# Altium PCB 辉光管时钟2号.pcbdoc (part 2 of 2)
Units mil, origin at the board's own origin, x right, y up, seen from the top; angles counter-clockwise.
Board outline 9093.95 x 3420 mil, 2 copper layers (Top Layer, Bottom Layer); 109 components, 221 nets, 539 pads, 88 vias.
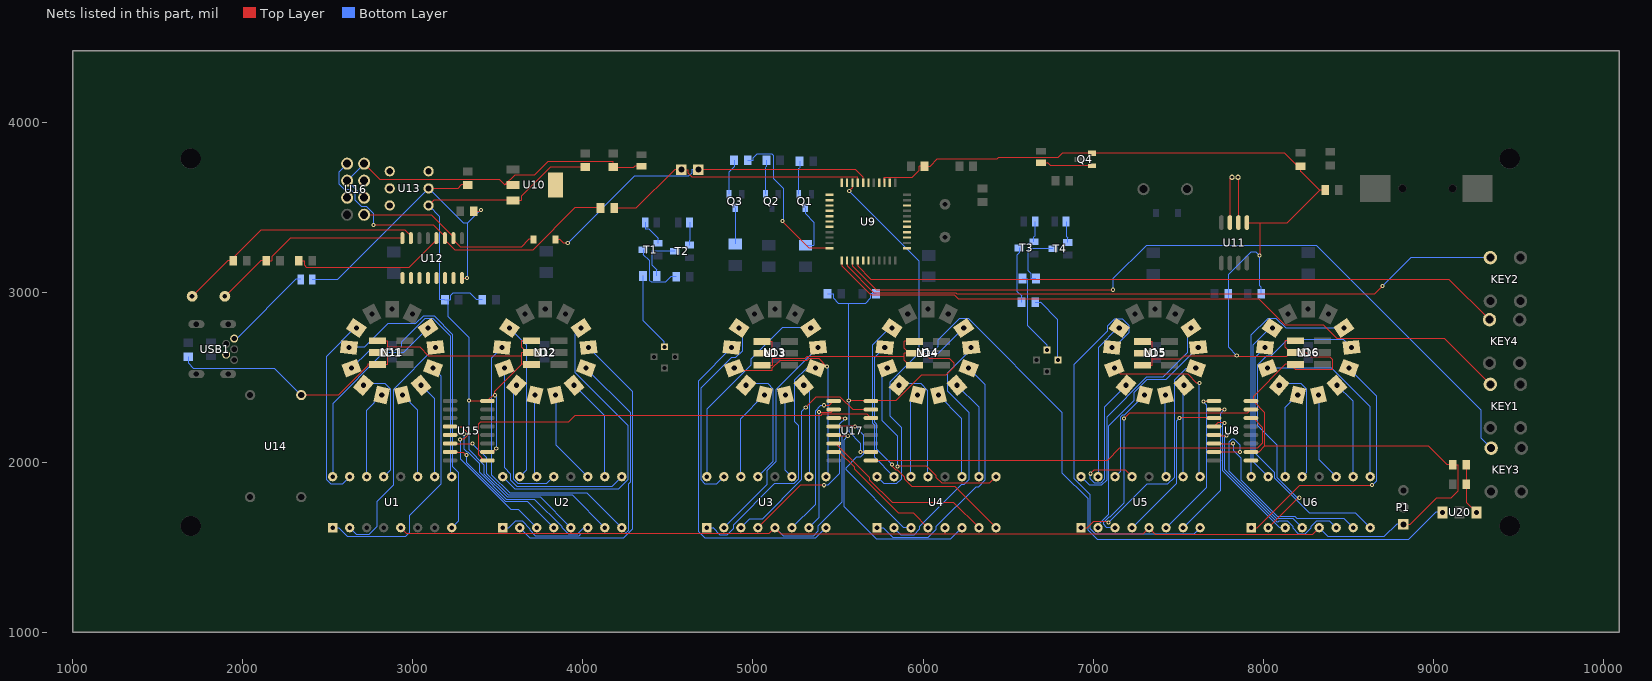
[diagram p2: the nets of this part, all layers, seen from the top]

## Via types
v1: diameter 24, hole 12, Top Layer to Bottom Layer, 88 vias

## Nets (pads, with @x,y where several pads share a name; then routed paths per layer and width w, separated by ;. In a path a pad name is that pad's centre, name@x,y a point inside that pad or via, vN(x,y) a via of type N, cw(c..) or ccw(c..) an arc to the next point about the centre after c; other vN are vias at no path point) (continued)
P2.3: R6.1 U9.33 | length 936.9
  Top Layer w6: v1(5172.45,3417.2) 5331.55,3258 U9.33@5450.95,3258
  Bottom Layer w6: R6.1@4968.95,3775 5000.85,3775 5000.85,3788.9 5025.75,3813.8 5110.75,3813.8 5118.95,3805.6 5118.95,3670.1 5177.55,3611.6 5177.55,3422.2 v1(5172.45,3417.2)
P2.4: KEY1.3 U9.34 | length 4134.6
  Top Layer w6: U9.34@5521.95,3187 5521.95,3154.3 5691.55,2984.7 6183.95,2984.7 6208.25,2960.5 7975.05,2960.5 8126.45,2809 8352.75,2809 8432.15,2729.6 9063.75,2729.6 KEY1.3@9335.35,2457.9
P2.5: KEY2.3 U9.35 | length 3970.6
  Top Layer w6: U9.35@5552.95,3187 5552.95,3154.3 5710.35,2996.8 6192.25,2996.8 6198.35,2990.8 8656.45,2990.8 v1(8700.65,3035)
  Bottom Layer w6: v1(8700.65,3035) 8868.65,3202.9 KEY2.3@9335.35,3202.9
P2.6: KEY3.3 U9.36 | length 4580.7
  Top Layer w6: U9.36@5584.95,3187 5584.95,3154.3 5725.25,3014 v1(7115.55,3014)
  Bottom Layer w6: v1(7115.55,3014) 7115.55,3077.6 7311.75,3273.8 8313.95,3273.8 9281.85,2305.9 9281.85,2141.4 KEY3.3@9340.35,2082.9
P2.7: KEY4.3 U9.37 | length 3878.2
  Top Layer w6: U9.37@5615.95,3187 5615.95,3154.3 5696.55,3073.7 9094.65,3073.7 KEY4.3@9330.35,2837.9
P2.A: U2.3 U15.4 | length 922.7
  Top Layer w6: U15.4@3219.95,2210 3286.75,2210 3323.95,2172.9 3323.95,2158.4 3300.35,2134.8 v1(3277.75,2134.8)
  Bottom Layer w6: v1(3277.75,2134.8) 3277.75,2021.4 3574.85,1724.4 3619.55,1724.4 U2.3@3728.95,1615
P2.B: U2.6 U15.5 | length 1157.5
  Top Layer w6: U15.5@3219.95,2160 3225.45,2165.5 v1(3301.05,2165.5)
  Bottom Layer w6: v1(3301.05,2165.5) 3301.05,2078.8 3317.25,2062.7 3324.45,2062.7 3391.95,1995.2 3389.55,1992.8 3389.55,1944 3550.15,1783.4 3714.55,1783.4 3875.15,1622.8 3875.15,1616.6 3913.45,1578.3 3968.65,1578.3 4005.35,1615 U2.6@4028.95,1615
P2.C: U2.7 U15.6 | length 1168
  Top Layer w6: U15.6@3219.95,2110 v1(3350.05,2110)
  Bottom Layer w6: v1(3350.05,2110) 3431.45,2028.5 3431.45,1936.4 3560.15,1807.7 3936.25,1807.7 U2.7@4128.95,1615
P2.D: U2.4 U15.7 | length 817.3
  Top Layer w6: U15.7@3219.95,2060 3297.25,2060 v1(3315.65,2041.6)
  Bottom Layer w6: v1(3315.65,2041.6) 3315.65,2000.7 3545.05,1771.3 3672.65,1771.3 U2.4@3828.95,1615
P3.2: U9.20 U20.1 | length 5263.2
  Top Layer w6: v1(5566.15,3594.3) 5582.15,3610.3 5584.95,3610.3 U9.20@5584.95,3643
  Bottom Layer w6: v1(5566.15,3594.3) 5978.85,3181.6 5978.85,2663.3 5989.05,2653 6062.15,2653 6087.05,2678 6087.05,2717.6 6213.35,2843.8 6267.45,2843.8 6819.75,2291.5 6819.75,1935.1 6970.05,1784.8 6970.05,1601.1 7027.25,1543.9 8853.75,1543.9 9014.85,1705 U20.1@9053.95,1705
P3.4: U9.22
P3.A: U3.3 U17.15 | length 1349
  Top Layer w6: v1(5310.45,2322.7) 5373.15,2385.4 5510.75,2385.4 5586.05,2310 U17.15@5692.95,2310
  Bottom Layer w6: U3.3@4928.95,1615 4981.85,1667.9 5056.15,1667.9 5287.55,1899.3 5287.55,2299.8 v1(5310.45,2322.7)
P3.B: U3.6 U17.1 | length 876.5
  Top Layer w6: v1(5418.35,2335) 5449.95,2335 U17.1@5474.95,2360
  Bottom Layer w6: U3.6@5228.95,1615 5368.15,1754.2 5368.15,2303.7 5399.45,2335 v1(5418.35,2335)
P3.C: U3.7 U17.2 | length 796.7
  Top Layer w6: v1(5389.35,2294.7) 5459.65,2294.7 U17.2@5474.95,2310
  Bottom Layer w6: U3.7@5328.95,1615 5389.35,1675.3 v1(5389.35,2294.7)
P3.D: U3.4 U17.3 | length 1017.1
  Top Layer w6: U3.4@5028.95,1615 5278.75,1864.8 v1(5417.35,1864.8) ; U17.3@5474.95,2260 5538.45,2260 v1(5542.35,2256.2)
  Bottom Layer w6: v1(5417.35,1864.8) 5439.75,1864.8 5508.45,1933.5 5508.45,2222.3 v1(5542.35,2256.2)
P4.A: U4.3 U17.4 | length 982.5
  Top Layer w6: U17.4@5474.95,2210 5475.25,2210.3 v1(5600.55,2210.3)
  Bottom Layer w6: v1(5600.55,2210.3) 5652.45,2158.4 5652.45,2049.9 5633.55,2031 5610.15,2031 5547.45,1968.3 5547.45,1954.3 5886.75,1615 U4.3@5928.95,1615
P4.B: U4.6 U17.5 | length 1312.9
  Top Layer w6: U17.5@5474.95,2160 5480.05,2154.9 v1(5557.35,2154.9)
  Bottom Layer w6: v1(5557.35,2154.9) 5535.25,2132.9 5535.25,1737.1 5726.35,1546 6159.95,1546 U4.6@6228.95,1615
P4.C: U4.7 U17.6 | length 1067.1
  Top Layer w6: U17.6@5474.95,2110 5486.55,2110 5687.95,1908.6 5687.95,1894.9 5820.75,1762.1 6181.85,1762.1 U4.7@6328.95,1615
P4.D: U4.4 U17.7 | length 744.5
  Top Layer w6: U17.7@5474.95,2060 5507.45,2060 5594.45,1973 5594.45,1962.4 5855.25,1701.6 5942.35,1701.6 U4.4@6028.95,1615
P5.A: U5.3 U8.15 | length 1520.3
  Top Layer w6: v1(7182.55,2257.9) 7211.85,2287.3 7905.25,2287.3 U8.15@7927.95,2310
  Bottom Layer w6: U5.3@7128.95,1615 7080.75,1615 7061.45,1634.3 7061.45,1647.5 7094.65,1680.7 7101.45,1680.7 7182.55,1761.7 v1(7182.55,2257.9)
P5.B: U5.6 U8.1 | length 912.4
  Top Layer w6: v1(7647.75,2356.2) 7706.15,2356.2 U8.1@7709.95,2360
  Bottom Layer w6: U5.6@7428.95,1615 7667.95,1853.9 7667.95,2336.1 v1(7647.75,2356.2)
P5.C: U5.7 U8.2 | length 857.7
  Top Layer w6: U8.2@7709.95,2310 v1(7771.95,2310)
  Bottom Layer w6: U5.7@7528.95,1615 7749.85,1835.9 7749.85,2287.9 v1(7771.95,2310)
P5.D: U5.4 U8.3 | length 963
  Top Layer w6: v1(7507.25,2260) U8.3@7709.95,2260
  Bottom Layer w6: U5.4@7228.95,1615 7490.75,1876.8 7490.75,2243.5 v1(7507.25,2260)
P6.A: U6.3 U8.4 | length 860.8
  Top Layer w6: U8.4@7709.95,2210 7731.25,2231.3 v1(7771.55,2231.3)
  Bottom Layer w6: v1(7771.55,2231.3) 7761.95,2221.7 7761.95,1951.1 8098.15,1615 U6.3@8128.95,1615
P6.B: U6.6 U8.5 | length 1153.8
  Top Layer w6: U8.5@7709.95,2160 7713.55,2156.4 v1(7783.15,2156.4)
  Bottom Layer w6: v1(7783.15,2156.4) 7774.15,2147.4 7774.15,1956.2 8083.65,1646.7 8086.15,1646.7 8091.85,1652.4 8143.55,1652.4 8175.15,1620.7 8175.15,1610.4 8209.35,1576.3 8242.65,1576.3 8278.95,1612.6 8278.95,1621.4 8310.25,1652.6 8391.35,1652.6 U6.6@8428.95,1615
P6.C: U6.7 U8.6 | length 1122.9
  Top Layer w6: U8.6@7709.95,2110 v1(7823.35,2110)
  Bottom Layer w6: v1(7823.35,2110) 7823.35,2070.9 7866.65,2027.7 7866.65,1898 8081.05,1683.6 8186.05,1683.6 8198.25,1671.5 8472.45,1671.5 U6.7@8528.95,1615
P6.D: U6.4 U8.7 | length 1017.8
  Top Layer w6: U8.7@7709.95,2060 7710.25,2059.7 v1(7864.45,2059.7)
  Bottom Layer w6: v1(7864.45,2059.7) 7864.45,2098.8 7829.45,2133.8 7815.85,2133.8 7798.35,2116.3 7798.35,1949.1 8075.95,1671.5 8172.45,1671.5 U6.4@8228.95,1615
PP1.1: N11.3 U1.15 | length 1133.7
  Bottom Layer w6: U1.15@2628.95,1915 2588.25,1874.3 2517.05,1874.3 2490.35,1901 2490.35,2620 2659.85,2789.5 N11.3@2668.35,2789.47
PP1.2: N11.4 U1.8 | length 1898.9
  Bottom Layer w6: N11.4@2624.95,2674.9 2715.05,2674.9 2853.55,2813.5 3015.85,2813.5 3061.25,2859 3128.15,2859 3236.35,2750.7 3236.35,1972.5 3269.65,1939.1 3269.65,1655.7 U1.8@3228.95,1615
PP1.3: N11.5 U1.9 | length 1591.4
  Bottom Layer w6: N11.5@2639.65,2553.3 2742.85,2656.6 2910.45,2656.6 2933.05,2679.2 2933.05,2706.5 3070.85,2844.3 3120.15,2844.3 3224.25,2740.2 3224.25,1919.7 U1.9@3228.95,1915
PP1.4: N11.6 U1.13 | length 708.3
  Bottom Layer w6: N11.6@2709.25,2452.5 2717.15,2460.5 2838.55,2460.5 2870.15,2428.9 2870.15,1956.2 U1.13@2828.95,1915
PP1.5: N11.7 U1.14 | length 517.4
  Bottom Layer w6: U1.14@2728.95,1915 2728.95,2306.9 N11.7@2817.75,2395.6
PP1.6: N11.8 U1.11 | length 517.4
  Bottom Layer w6: N11.8@2940.18,2395.62 3028.95,2306.8 U1.11@3028.95,1915
PP1.7: N11.9 U1.10 | length 570.8
  Bottom Layer w6: N11.9@3048.64,2452.54 3128.95,2372.2 U1.10@3128.95,1915
PP1.8: N11.10 U1.1 | length 1544.6
  Bottom Layer w6: U1.1@2528.95,1615 2565.55,1615 2615.25,1565.3 2959.05,1565.3 2982.95,1589.2 2982.95,1689.2 3166.45,1872.6 3166.45,2505.1 N11.10@3118.22,2553.34
PP1.9: N11.11 U1.2 | length 1389.5
  Bottom Layer w6: U1.2@2628.95,1615 2666.35,1577.6 2744.95,1577.6 2791.15,1623.7 2791.15,1769.3 2888.15,1866.3 2888.15,2430.1 N11.11@3132.99,2674.94
PP1.10: N11.12 U1.16 | length 1174.3
  Bottom Layer w6: U1.16@2528.95,1915 2528.95,2344.2 2827.65,2642.9 2943.05,2642.9 N11.12@3089.55,2789.47
PP2.1: N12.3 U2.15 | length 931
  Bottom Layer w6: N12.3@3568.35,2789.47 3666.85,2690.9 3666.85,1952.9 U2.15@3628.95,1915
PP2.2: N12.4 U2.8 | length 1670.5
  Bottom Layer w6: N12.4@3524.95,2674.9 3461.85,2611.9 3461.85,1926.8 3568.95,1819.8 4024.15,1819.8 U2.8@4228.95,1615
PP2.3: N12.5 U2.9 | length 1366.3
  Bottom Layer w6: N12.5@3539.65,2553.3 3539.65,1966.2 3577.15,1928.7 3577.15,1894.1 3614.55,1856.6 4170.55,1856.6 U2.9@4228.95,1915
PP2.4: N12.6 U2.13 | length 825.7
  Bottom Layer w6: N12.6@3609.25,2452.5 3592.25,2435.5 3592.25,1900 3620.25,1872 3785.95,1872 U2.13@3828.95,1915
PP2.5: N12.7 U2.14 | length 485.2
  Bottom Layer w6: N12.7@3717.75,2395.6 3717.75,1926.2 U2.14@3728.95,1915
PP2.6: N12.8 U2.11 | length 558.8
  Bottom Layer w6: N12.8@3840.18,2395.62 3840.15,2103.8 U2.11@4028.95,1915
PP2.7: N12.9 U2.10 | length 612.2
  Bottom Layer w6: N12.9@3948.64,2452.54 4128.95,2272.2 U2.10@4128.95,1915
PP2.8: N12.10 U2.1 | length 1872.5
  Bottom Layer w6: U2.1@3528.95,1615 3565.55,1615 3602.35,1651.8 3645.15,1651.8 3690.25,1606.7 3690.25,1598.9 3723.05,1566.2 3976.55,1566.2 3988.65,1578.3 4245.45,1578.3 4265.55,1598.4 4265.55,1870.1 4277.65,1882.3 4277.65,2293.9 N12.10@4018.22,2553.34
PP2.9: N12.11 U2.2 | length 1883.3
  Bottom Layer w6: U2.2@3628.95,1615 3689.95,1554 4238.35,1554 4289.85,1605.5 4289.85,2418.1 N12.11@4032.99,2674.94
PP2.10: N12.12 U2.16 | length 1821
  Bottom Layer w6: U2.16@3528.95,1915 3599.45,1844.5 4210.25,1844.5 4265.55,1899.8 4265.55,2214.9 3955.45,2525 3955.45,2755.3 N12.12@3989.55,2789.47
PP3.1: N13.3 U3.15 | length 1176.9
  Bottom Layer w6: U3.15@4828.95,1915 4787.85,1873.9 4717.95,1873.9 4692.35,1899.5 4692.35,2434 4871.65,2613.3 4896.45,2613.3 4935.85,2652.7 4935.85,2772 N13.3@4918.35,2789.47
PP3.2: N13.4 U3.8 | length 1955.3
  Bottom Layer w6: N13.4@4874.95,2674.9 4680.25,2480.2 4680.25,1591.2 4719.35,1552.1 5366.05,1552.1 U3.8@5428.95,1615
PP3.3: N13.5 U3.9 | length 1259.9
  Top Layer w6: N13.5@4889.65,2553.3 4901.85,2541.2 5113.05,2541.2 5114.75,2543 5114.75,2554.6 5159.25,2599.1 5319.55,2599.1 5331.65,2611.2 5386.15,2611.2 v1(5435.25,2562)
  Bottom Layer w6: U3.9@5428.95,1915 5439.45,1925.5 5439.45,2557.8 v1(5435.25,2562)
PP3.4: N13.6 U3.13 | length 729
  Bottom Layer w6: N13.6@4959.25,2452.5 4967.15,2460.5 5088.55,2460.5 5120.15,2428.9 5120.15,2006.2 U3.13@5028.95,1915
PP3.5: N13.7 U3.14 | length 538.1
  Bottom Layer w6: U3.14@4928.95,1915 4928.95,2256.9 N13.7@5067.75,2395.6
PP3.6: N13.8 U3.11 | length 496.7
  Bottom Layer w6: N13.8@5190.18,2395.62 5190.15,1953.8 U3.11@5228.95,1915
PP3.7: N13.9 U3.10 | length 552.2
  Bottom Layer w6: N13.9@5298.64,2452.54 5331.55,2419.6 5331.55,1917.6 U3.10@5328.95,1915
PP3.8: N13.10 U3.1 | length 1450.1
  Bottom Layer w6: U3.1@4728.95,1615 4765.55,1615 4808.95,1571.6 4845.05,1571.6 4882.75,1609.2 4882.75,1630.4 5124.95,1872.6 5239.65,1872.6 5267.05,1900 5267.05,2217.6 5243.65,2240.9 5243.65,2481.7 5315.35,2553.3 N13.10@5368.22,2553.34
PP3.9: N13.11 U3.2 | length 1289.4
  Bottom Layer w6: U3.2@4828.95,1615 5083.25,1869.3 5083.25,1951.6 5138.15,2006.5 5138.15,2430.1 N13.11@5382.99,2674.94
PP3.10: N13.12 U3.16 | length 1226.1
  Bottom Layer w6: U3.16@4728.95,1915 4728.95,2311 4987.95,2570.1 4987.95,2606.4 5171.05,2789.5 N13.12@5339.55,2789.47
PP4.1: N14.3 U4.15 | length 982.8
  Bottom Layer w6: N14.3@5818.35,2789.47 5803.75,2789.5 5704.15,2689.9 5704.15,2229.5 5716.05,2217.6 5716.05,2151.5 5715.15,2150.6 5715.15,2028.8 U4.15@5828.95,1915
PP4.2: N14.4 U4.8 | length 1533
  Top Layer w6: v1(5818.25,1985.7) 5818.25,1977.4 5841.85,1953.8 5850.15,1953.8 5892.35,1911.6 5892.35,1899.2 5935.45,1856.1 6187.85,1856.1 U4.8@6428.95,1615
  Bottom Layer w6: N14.4@5774.95,2674.9 5716.25,2616.3 5716.25,2234.6 5728.35,2222.4 5728.35,2146.7 5727.25,2145.5 5727.25,2076.7 v1(5818.25,1985.7)
PP4.3: N14.5 U4.9 | length 1269.1
  Top Layer w6: v1(5850.55,1974.9) 6023.15,1974.9 6078.95,1919 6078.95,1908.2 6111.45,1875.7 6389.65,1875.7 U4.9@6428.95,1915
  Bottom Layer w6: N14.5@5789.65,2553.3 5761.45,2525.2 5761.45,2242.5 5850.55,2153.4 v1(5850.55,1974.9)
PP4.4: N14.6 U4.13 | length 694.9
  Bottom Layer w6: N14.6@5859.25,2452.5 5867.15,2460.5 5988.55,2460.5 6028.95,2420.1 U4.13@6028.95,1915
PP4.5: N14.7 U4.14 | length 496.7
  Bottom Layer w6: U4.14@5928.95,1915 5928.95,2356.9 N14.7@5967.75,2395.6
PP4.6: N14.8 U4.11 | length 538.1
  Bottom Layer w6: N14.8@6090.18,2395.62 6228.95,2256.8 U4.11@6228.95,1915
PP4.7: N14.9 U4.10 | length 591.5
  Bottom Layer w6: N14.9@6198.64,2452.54 6328.95,2322.2 U4.10@6328.95,1915
PP4.8: N14.10 U4.1 | length 1508.2
  Bottom Layer w6: U4.1@5728.95,1615 5765.55,1615 5822.35,1558.2 6031.65,1558.2 6078.95,1605.5 6078.95,1622.8 6313.25,1857.1 6326.75,1857.1 6365.95,1896.3 6365.95,2455.6 N14.10@6268.22,2553.34
PP4.9: N14.11 U4.2 | length 1491
  Bottom Layer w6: U4.2@5828.95,1615 5872.35,1571.6 5945.05,1571.6 5978.95,1605.5 5978.95,1621.8 6223.75,1866.6 6237.95,1866.6 6268.75,1897.3 6268.75,2292.8 6141.65,2419.9 6141.65,2524 6282.95,2665.3 N14.11@6282.99,2674.94
PP4.10: N14.12 U4.16 | length 1337.5
  Bottom Layer w6: U4.16@5728.95,1915 5771.25,1872.7 5843.65,1872.7 5871.65,1900.7 5871.65,2205.9 5803.65,2273.9 5803.65,2469.9 5971.15,2637.4 6087.55,2637.4 N14.12@6239.55,2789.47
PP5.1: N15.3 U5.15 | length 931.2
  Bottom Layer w6: U5.15@7028.95,1915 7028.95,2673.8 7144.55,2789.5 N15.3@7153.35,2789.47
PP5.2: N15.4 U5.8 | length 2329
  Bottom Layer w6: N15.4@7109.95,2674.9 7124.45,2674.9 7209.95,2760.4 7209.95,2806.4 7172.15,2844.2 7125.65,2844.2 7084.85,2803.4 7084.85,2772.6 6889.55,2577.4 6889.55,1901.4 6983.25,1807.7 6983.25,1608.4 7015.55,1576.1 7590.05,1576.1 U5.8@7628.95,1615
PP5.3: N15.5 U5.9 | length 1088.9
  Top Layer w6: N15.5@7124.65,2553.3 7160.95,2517.1 7557.95,2517.1 7609.45,2465.6 v1(7624.95,2465.6)
  Bottom Layer w6: v1(7624.95,2465.6) 7624.95,1919 U5.9@7628.95,1915
PP5.4: N15.6 U5.13 | length 1007.2
  Top Layer w6: v1(6983.35,1932.4) 7002.55,1951.6 7192.35,1951.6 U5.13@7228.95,1915
  Bottom Layer w6: v1(6983.35,1932.4) 6983.35,1904 7010.85,1876.4 7043.35,1876.4 7066.15,1899.3 7066.15,2324.5 N15.6@7194.25,2452.5
PP5.5: N15.7 U5.14 | length 559.8
  Bottom Layer w6: U5.14@7128.95,1915 7161.45,1947.4 7161.45,2266.6 7173.75,2279 7186.05,2279 N15.7@7302.75,2395.6
PP5.6: N15.8 U5.11 | length 482.2
  Bottom Layer w6: N15.8@7425.18,2395.62 7425.15,1918.8 U5.11@7428.95,1915
PP5.7: N15.9 U5.10 | length 539.4
  Bottom Layer w6: U5.10@7528.95,1915 7528.95,2447.8 N15.9@7533.64,2452.54
PP5.8: N15.10 U5.1 | length 1403.3
  Top Layer w6: U5.1@6928.95,1615 6965.55,1615 7002.15,1651.6 7082.75,1651.6 v1(7089.75,1644.6)
  Bottom Layer w6: v1(7089.75,1644.6) 7318.75,1873.6 7439.35,1873.6 7478.65,1912.9 7478.65,2484.1 7547.95,2553.3 N15.10@7603.22,2553.34
PP5.9: N15.11 U5.2 | length 1369.4
  Bottom Layer w6: U5.2@7028.95,1615 7028.95,1632.2 7091.05,1694.3 7091.15,1694.3 7091.15,2213.5 7241.35,2363.7 7241.35,2410 7318.15,2486.7 7429.85,2486.7 N15.11@7617.99,2674.94
PP5.10: N15.12 U5.16 | length 1340.6
  Bottom Layer w6: U5.16@6928.95,1915 6979.65,1864.3 7048.35,1864.3 7078.95,1894.9 7078.95,2264.8 7313.05,2498.9 7410.35,2498.9 7554.05,2642.6 7554.05,2769 N15.12@7574.55,2789.47
PP6.1: N16.3 U6.15 | length 965.3
  Bottom Layer w6: U6.15@8028.95,1915 7941.05,2002.9 7941.05,2690.7 8039.85,2789.5 N16.3@8053.35,2789.47
PP6.2: N16.4 U6.8 | length 1521.9
  Bottom Layer w6: N16.4@8009.95,2674.9 7953.25,2618.2 7953.25,2051.8 8066.85,1938.2 8066.85,1906.3 8274.35,1698.8 8545.15,1698.8 U6.8@8628.95,1615
PP6.3: N16.5 U6.9 | length 1110
  Bottom Layer w6: N16.5@8024.65,2553.3 8402.55,2553.3 8628.95,2327 U6.9@8628.95,1915
PP6.4: N16.6 U6.13 | length 702.1
  Bottom Layer w6: N16.6@8094.25,2452.5 8102.15,2460.5 8223.55,2460.5 8255.15,2428.9 8255.15,1941.2 U6.13@8228.95,1915
PP6.5: N16.7 U6.14 | length 511.2
  Bottom Layer w6: U6.14@8128.95,1915 8128.95,2321.9 N16.7@8202.75,2395.6
PP6.6: N16.8 U6.11 | length 523.6
  Bottom Layer w6: N16.8@8325.18,2395.62 8325.15,2018.8 U6.11@8428.95,1915
PP6.7: N16.9 U6.10 | length 577
  Bottom Layer w6: N16.9@8433.64,2452.54 8528.95,2357.2 U6.10@8528.95,1915
PP6.8: N16.10 U6.1 | length 1582.8
  Top Layer w6: U6.1@7928.95,1615 7965.55,1615 8215.45,1864.9 v1(8640.55,1864.9)
  Bottom Layer w6: N16.10@8503.22,2553.34 8667.65,2388.9 8667.65,1892 v1(8640.55,1864.9)
PP6.9: N16.11 U6.2 | length 1777.8
  Top Layer w6: U6.2@8028.95,1615 8205.15,1791.2 v1(8211.95,1791.2)
  Bottom Layer w6: v1(8211.95,1791.2) 8199.05,1791.2 8078.95,1911.3 8078.95,2102.3 7965.35,2215.9 7965.35,2570.3 8017.45,2622.4 8042.75,2622.4 8139.95,2719.6 8473.35,2719.6 N16.11@8517.99,2674.94
PP6.10: N16.12 U6.16 | length 1444.3
  Bottom Layer w6: U6.16@7928.95,1915 7928.95,2748.4 8028.35,2847.8 8073.85,2847.8 8132.15,2789.5 N16.12@8474.55,2789.47
Q1_1: Q1.1 R4.2 | length 197
  Bottom Layer w6: Q1.1@5268.95,3575 5268.95,3727.3 5273.95,3732.4 R4.2@5273.95,3770
Q1_3: Q1.3 R13.1 | length 291
  Bottom Layer w6: Q1.3@5306.35,3496.26 5306.35,3462.5 5357.45,3411.5 5357.45,3275 R13.1@5308.95,3275
Q2_1: Q2.1 R5.2 | length 202
  Bottom Layer w6: Q2.1@5074.15,3575 5074.15,3732.5 5078.95,3737.4 R5.2@5078.95,3775
Q3_1: Q3.1 R6.2 | length 212.3
  Bottom Layer w6: Q3.1@4859.15,3575 4859.15,3707.5 4888.95,3737.4 R6.2@4888.95,3775
Q3_3: Q3.3 R15.1 | length 213.6
  Bottom Layer w6: R15.1@4895.96,3282.99 4895.95,3462 4896.55,3462.5 Q3.3@4896.55,3496.26
R8_2: R8.2 T1.C | length 371.2
  Bottom Layer w6: T1.C@4355.95,3250 4355.95,3221.2 4393.15,3184 4393.15,3068 4403.75,3057.3 4484.35,3057.3 4517.05,3090 R8.2@4548.95,3090
R9_1: Q4.1 R9.1 | length 307.2
  Top Layer w6: R9.1@6693.95,3761.53 6732.55,3761.5 6751.55,3742.6 Q4.1@6993.35,3742.6
R25_2: R25.2 T2.B | length 133.2
  Bottom Layer w6: T2.B@4626.95,3277 4626.95,3305.8 4627.45,3306.3 R25.2@4627.42,3410
R26_1: N2.K R26.1 | length 468.1
  Bottom Layer w6: R26.1@4353.95,3095 4353.95,2833 4478.95,2708 N2.K@4478.95,2678.74
R27_2: R27.2 T3.B | length 120.9
  Bottom Layer w6: T3.B@6651.95,3297 6651.95,3325.8 6658.95,3332.8 R27.2@6658.96,3415
R28_1: N3.K R28.1 | length 414.1
  Bottom Layer w6: R28.1@6658.95,2940 6690.85,2940 6792.65,2838.2 N3.K@6792.65,2600
R29_2: R29.2 T4.B | length 126.8
  Bottom Layer w6: R29.2@6840.85,3415 6840.85,3329.9 6849.95,3320.8 T4.B@6849.95,3292
R30_1: N4.K R30.1 | length 500.1
  Bottom Layer w6: R30.1@6583.95,3080 6615.85,3080 6615.85,2801 6728.95,2688 N4.K@6728.95,2658.74
RXD: R7.2 U12.3 U16.4 | length 2013.5
  Top Layer w6: v1(2768.85,3394.1) 3122.25,3394.1 3188.95,3327.4 U12.3@3188.95,3317 3188.95,3309 3250.25,3247.7 3704.65,3247.7 3951.95,3495 R7.2@4103.95,3495
  Bottom Layer w6: U16.4@2613.95,3755 2565.05,3706.1 2565.05,3636 2596.05,3605 2631.75,3605 2658.45,3578.3 2658.45,3543.5 2697.05,3505 2727.75,3505 2768.85,3463.9 v1(2768.85,3394.1)
S$18: 
S$20: 
S$21: 
S$23: 
T1_B: R19.2 T1.B | length 165.3
  Bottom Layer w6: R19.2@4367.03,3410 4367.05,3371.4 4386.35,3371.4 4441.95,3315.8 T1.B@4441.95,3287
T2_C: R26.2 T2.C | length 294.1
  Bottom Layer w6: R26.2@4433.95,3095 4433.95,3132.6 4405.25,3161.3 4405.25,3240 4407.05,3241.8 4502.45,3241.8 4504.35,3240 T2.C@4540.95,3240
T3_C: R28.2 T3.C | length 336.9
  Bottom Layer w6: T3.C@6565.95,3260 6565.95,3231.2 6552.05,3217.3 6552.05,3004.6 6578.95,2977.6 R28.2@6578.95,2940
T4_C: R30.2 T4.C | length 359.5
  Bottom Layer w6: R30.2@6663.95,3080 6632.05,3080 6632.05,3111.9 6614.15,3129.8 6614.15,3247.1 6622.05,3255 T4.C@6763.95,3255
TXD: D1.2 U12.2 U16.8 | length 1101.9
  Top Layer w6: U16.8@2713.95,3455 3109.85,3455 3238.95,3325.9 U12.2@3238.95,3317 3238.95,3308 3279.45,3267.4 3640.35,3267.4 3682.95,3310 D1.2@3709.95,3310
U8_9: U8.9
U9_1: U9.1
U9_3: U9.3
U9_4: U9.4
U9_5: U9.5
U9_6: U9.6
U9_9: U9.9
U9_13: U9.13
U9_15: U9.15
U9_17: U9.17
U9_18: D1.1 P4.1 U9.18 | length 2060.5
  Top Layer w6: D1.1@3837.95,3310 3864.95,3310 3886.45,3288.5 v1(3911.05,3288.5) ; P4.1@4678.95,3720 5603.65,3720 5647.95,3675.7 U9.18@5647.95,3643
  Bottom Layer w6: v1(3911.05,3288.5) 4302.35,3679.9 4618.85,3679.9 4638.85,3699.9 4638.85,3720 P4.1@4678.95,3720
U9_19: P5.1 R7.1 U9.19 | length 1588
  Top Layer w6: R7.1@4183.95,3495 4313.85,3495 4538.85,3720 P5.1@4578.95,3720 4619.05,3720 4619.05,3699.9 4643.25,3675.7 5615.95,3675.7 U9.19@5615.95,3643
U9_21: U9.21
U9_23: U9.23
U9_24: U9.24
U9_25: U9.25
U9_26: U9.26
U9_27: U9.27
U9_28: U9.28
U9_29: U9.29
U9_38: U9.38
U9_39: U9.39
U10_2: C20_10.2 C21_0.2 U10.2 U16.3 U16.5 U16.7 | length 2103.8
  Top Layer w6: U16.5@2713.95,3755 2806.25,3662.7 3507.75,3662.7 3540.45,3630 ; U10.2@3588.95,3630 3540.45,3630 ; C20_10.2@4343.95,3740 4305.35,3740 4300.35,3735 C21_0.2@4178.95,3735 4178.95,3766.9 3793.35,3766.9 3714.25,3687.8 3598.35,3687.8 3540.45,3630
  Bottom Layer w6: U16.7@2713.95,3555 U16.3@2613.95,3655 2632.45,3673.5 U16.5@2713.95,3755
U10_4: U10.4
U11_2: U11.2 X4.1 | length 267
  Top Layer w6: X4.1@7851.65,3675 7851.65,3411.3 U11.2@7853.95,3409
U11_3: U11.3 X4.2 | length 271.1
  Top Layer w6: U11.3@7803.95,3409 7803.95,3662.7 X4.2@7816.25,3675
U12_4: C7.2 U12.4 | length 916.4
  Top Layer w6: C7.2@2328.95,3185 2360.85,3185 2360.85,3161 2374.55,3147.3 2980.25,3147.3 3138.95,3306 U12.4@3138.95,3317
U12_7: C8.2 U12.7 X3.2 | length 1492.5
  Top Layer w6: X3.2@1702.45,2975 1912.05,3184.5 1912.05,3185 C8.2@1927.95,3185 ; C8.2@1943.95,3185 C8.2@1927.95,3185 ; U12.7@2988.95,3317 2988.95,3330.4 2953.75,3365.6 2108.65,3365.6 C8.2@1927.95,3185
U12_8: C9.2 U12.8 X3.1 | length 1199.2
  Top Layer w6: X3.1@1895.41,2975 1897.05,2975 2107.05,3185 C9.2@2138.95,3185 2170.85,3185 2170.85,3208.9 2278.95,3317 U12.8@2938.95,3317
U12_9: U12.9
U12_10: U12.10
U12_11: U12.11
U12_12: U12.12
U12_13: U12.13
U12_14: U12.14
U12_15: U12.15
U12_16: C10.2 C11.2 F1.2 U12.16 U13.2 | length 1966.7
  Top Layer w6: U13.2@3093.15,3610 3266.35,3610 3286.35,3630 C11.2@3323.95,3630 ; U12.16@3288.95,3083 v1(3319.15,3083) ; C10.2@3358.95,3475 3390.85,3475 v1(3399.95,3484.1)
  Bottom Layer w6: F1.2@2408.95,3074.99 2558.15,3075 3093.15,3610 3295.95,3407.2 3319.15,3407.2 ; v1(3319.15,3083) 3319.15,3407.2 ; v1(3399.95,3484.1) 3323.15,3407.2 3319.15,3407.2
U13_3: U13.3
U13_4: U13.4
U13_5: U13.5
U13_6: U13.6
U15_9: U15.9 U17.14 | length 2587.9
  Top Layer w6: U15.9@3437.95,2010 3419.95,2010 3383.55,2046.4 3383.55,2221.8 3396.65,2235 3913.75,2235 3952.35,2273.6 5398.05,2273.6 5405.85,2281.4 5671.55,2281.4 U17.14@5692.95,2260
U16_2: U16.2
U16_6: U16.6
U17_9: U8.14 U17.9 | length 2525.9
  Top Layer w6: U17.9@5692.95,2010 7083.35,2010 7154.25,2080.9 7964.15,2080.9 7993.35,2110.1 7993.35,2206.6 7939.95,2260 U8.14@7927.95,2260
U20_3: C14.1 R12.2 U20.3 | length 304.9
  Top Layer w6: R12.2@9193.95,1985 C14.1@9193.95,1870 9193.95,1765 U20.3@9253.95,1705
USB1_1: F1.1 USB1.1 | length 535.9
  Bottom Layer w6: USB1.1@1950.2,2727.2 1965.45,2727.2 2313.25,3075 F1.1@2342.02,3074.99
USB1_4: USB1.4
VCC: C1_0.2 C2.2 C5.2 C12.1 C13.2 C15.1 C16.1 C17.1 C18.1 C19.1 LD1.1 LD1.2 LD1.3 LD2.1 LD2.2 LD2.3 LD3.1 LD3.2 LD3.3 LD4.1 LD4.2 LD4.3 LD5.1 LD5.2 LD5.3 LD6.1 LD6.2 LD6.3 LED1.1 P1.1 Q4.2 R12.1 U1.5 U2.5 U3.5 U4.5 U5.5 U6.5 U8.10 U8.16 U9.14 U10.3 U11.1 U13.1 U14.3 U15.10 U15.16 U17.10 U17.16 | length 26888.9
  Top Layer w6: U14.3@2343.95,2395 2563.25,2395 2734.85,2566.6 2734.85,2575 LD1.3@2793.95,2575 2805.15,2575 2853.05,2575 2853.05,2645 LD1.2@2823.55,2645 ; LD1.2@2793.95,2645 LD1.2@2823.55,2645 ; LD1.1@2793.95,2715 2853.05,2715 2853.05,2674.5 ; U1.5@2928.95,1615 2965.55,1578.4 3928.95,1578.4 ; U13.1@3093.15,3509.6 3122.95,3539.4 U10.3@3588.95,3539.45 3613.15,3539.4 3637.45,3539.4 3637.45,3564 3808.45,3735 C1_0.2@4013.95,3735 ; v1(3330.15,2362.8) 3435.15,2362.8 U15.16@3437.95,2360 3471.75,2393.8 v1(3482.95,2393.8) 3482.95,2418.1 3639.85,2575 ; U15.10@3437.95,2060 3469.55,2060 v1(3490.65,2081.1) ; LD2.3@3698.95,2575 3639.85,2575 ; LD2.2@3698.95,2645 LD2.2@3669.45,2645 ; LD2.1@3698.95,2715 3639.85,2715 3639.85,2674.5 LD2.2@3669.45,2645 ; U2.5@3928.95,1615 3928.95,1578.4 ; LD3.3@5053.95,2570 5113.05,2570 5113.05,2611.2 ; LD3.2@5053.95,2640 LD3.2@5083.55,2640 ; LD3.1@5053.95,2710 5113.05,2710 5113.05,2669.5 LD3.2@5083.55,2640 ; v1(5563.15,2362.8) 5690.15,2362.8 U17.16@5692.95,2360 5839.15,2360 5989.45,2510.3 6133.35,2510.3 6180.85,2557.8 6180.85,2585.3 6154.95,2611.2 6036.85,2611.2 6008.05,2640 LD4.2@5948.95,2640 LD4.2@5919.45,2640 ; v1(5631.25,2060) U17.10@5692.95,2060 ; U9.14@5772.95,3643 5772.95,3675.7 5936.65,3675.7 5977.05,3716 5977.05,3740 5992.95,3740 C2.2@6008.95,3740 6040.85,3740 6081.15,3780.2 6432.05,3780.2 6442.15,3790.3 6791.35,3790.3 6818.35,3817.4 6993.35,3817.4 8125.55,3817.4 C5.2@8218.95,3724 ; LD4.3@5948.95,2570 5919.45,2570 5889.85,2599.5 5889.85,2623.3 ; LD4.1@5948.95,2710 5889.85,2710 5889.85,2669.5 LD4.2@5919.45,2640 ; U4.5@6128.95,1615 6128.95,1577.7 ; LD5.3@7288.95,2570 7348.05,2570 7348.05,2605 ; LD5.2@7288.95,2640 LD5.2@7318.55,2640 ; LD5.1@7288.95,2710 7348.05,2710 7348.05,2669.5 LD5.2@7318.55,2640 ; v1(7844.35,2627.4) v1@7844.35,2624.3 ; U11.1@7903.95,3409 7978.95,3409 ; U8.10@7927.95,2060 7972.55,2060 8005.45,2092.9 ; U8.16@7927.95,2360 U8.16@7940.05,2360 ; v1(7978.95,3214.2) 7978.95,3409 ; LD6.3@8188.95,2575 LD6.3@8159.45,2575 ; LD6.1@8188.95,2715 8129.85,2715 8129.85,2674.5 LD6.2@8159.45,2645 ; C5.2@8218.95,3740 C5.2@8218.95,3724 ; U6.5@8328.95,1615 8291.65,1577.7 7366.25,1577.7 U5.5@7328.95,1615 7291.65,1577.7 6128.95,1577.7 ; C13.2@8363.95,3600 8332.05,3600 ; P1.1@8823.95,1635 8864.05,1635 9019.75,1790.6 9104.35,1790.6 9145.85,1832.2 9145.85,1985 R12.1@9113.95,1985 9082.05,1985 8974.05,2092.9 8005.45,2092.9 ; LD1.2@2823.55,2645 2853.05,2674.5 ; 2853.05,2674.5 3043.15,2674.5 3095.05,2622.7 3639.85,2622.7 ; 3639.85,2575 3639.85,2622.7 ; 3639.85,2622.7 3639.85,2645 LD2.2@3669.45,2645 ; 3928.95,1578.4 5092.35,1578.4 U3.5@5128.95,1615 5166.25,1577.7 6128.95,1577.7 ; LD3.2@5083.55,2640 5113.05,2640 5113.05,2611.2 ; 5113.05,2611.2 5308.45,2611.2 5320.55,2623.3 5889.85,2623.3 ; 5889.85,2623.3 5889.85,2640 LD4.2@5919.45,2640 ; LD5.2@7318.55,2640 7348.05,2640 7348.05,2605 ; 7348.05,2605 7513.25,2605 7532.55,2624.3 v1@7844.35,2624.3 ; v1@7844.35,2624.3 8138.65,2624.3 LD6.2@8159.45,2645 ; U8.16@7940.05,2360 8005.45,2294.6 8005.45,2092.9 ; U8.16@7940.05,2360 7940.05,2385.2 8129.85,2575 LD6.3@8159.45,2575 ; 7978.95,3409 8141.05,3409 8332.05,3600 ; LD6.3@8159.45,2575 8188.15,2546.2 8406.35,2546.2 8408.05,2548 8408.05,2602 8394.25,2615.8 8282.15,2615.8 8253.05,2645 LD6.2@8188.95,2645 LD6.2@8159.45,2645 ; C5.2@8218.95,3724 8218.95,3708.1 8223.95,3708.1 8332.05,3600
  Bottom Layer w6: LED1.1@1678.95,2620 1678.95,2585.3 1710.35,2553.9 2185.05,2553.9 U14.3@2343.95,2395 ; U13.1@3093.15,3509.6 3157.05,3445.7 3157.05,2955 C12.1@3188.95,2955 C12.1@3204.95,2955 ; C15.1@3408.95,2955 3377.05,2955 3337.75,2994.3 3236.25,2994.3 3220.85,2978.9 3220.85,2955 C12.1@3204.95,2955 ; v1(3482.95,2393.8) 3490.65,2386.1 v1(3490.65,2081.1) ; U2.5@3928.95,1615 3748.35,1795.6 3555.15,1795.6 3418.15,1932.6 3418.15,1986.1 3328.95,2075.3 3328.95,2361.6 v1(3330.15,2362.8) 3330.15,2733.3 3204.95,2858.5 C12.1@3204.95,2955 ; U3.5@5128.95,1615 5179.75,1564.2 5353.65,1564.2 5382.15,1592.7 5382.15,1625 5520.65,1763.5 5520.65,2148.4 5553.25,2181 5562.15,2181 ; C16.1@5438.95,2990 5470.85,2990 5470.85,2968.1 5502.85,2936.1 5563.15,2936.1 ; v1(5631.25,2060) 5631.25,2111.9 5562.15,2181 ; C17.1@5723.95,2990 5692.05,2990 5692.05,2966 5662.15,2936.1 5563.15,2936.1 ; v1(7844.35,2627.4) 7793.95,2677.7 C18.1@7793.95,2990 7793.95,3101.9 7927.45,3235.3 7957.85,3235.3 v1(7978.95,3214.2) 7978.95,3037.7 7988.95,3027.6 C19.1@7988.95,2990 ; U6.5@8328.95,1615 8382.85,1561.1 8709.95,1561.1 8783.85,1635 P1.1@8823.95,1635 ; 5562.15,2181 5563.45,2182.4 5563.45,2362.5 v1(5563.15,2362.8) 5563.15,2936.1
pads on no net: B1.0

## Text inside footprints (layer, text, board x,y; h text height)
BUZZER2: Top Overlay "+" at 7292.23,3730.58 h80 r135